# EAGLE board Scematic (EAGLE 7.2.0)
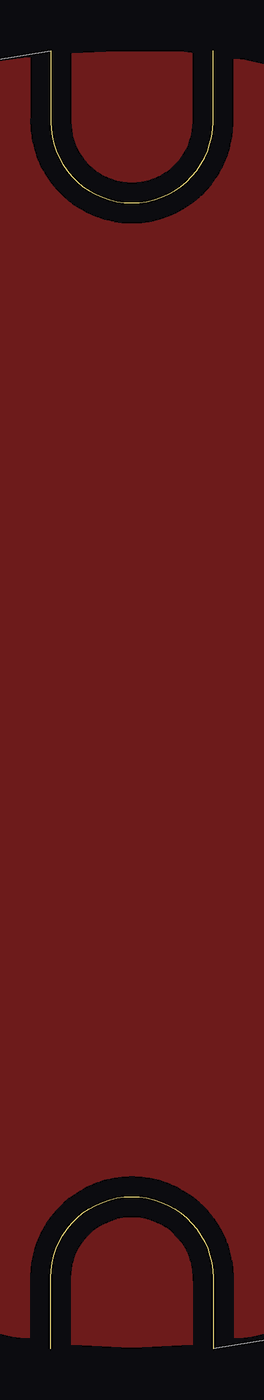
[diagram p0: board, top side]
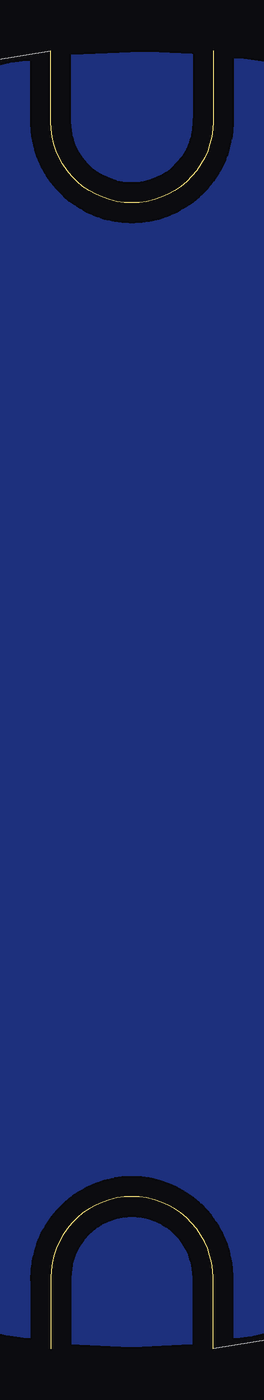
[diagram p1: board, bottom side, seen from below]

Size 8 x 64 mm. Coordinates in mm from the lower left corner, seen from the top.
Copper layers (1*16): Top 0.035mm / dielectric 1.5mm / Bottom 0.035mm
Design rules "default": minimum track width 10mil, minimum drill 24mil, track to track 8mil, track to pad 8mil, pad to pad 8mil, via to via 8mil, smd to smd 8mil, copper to edge 40mil, drill to drill 8mil, minimum pad ring 10mil, minimum via ring 8mil, stop-mask expansion 4mil, vias tented up to drill 0mil, thermal gap 10mil

## Placement (x,y rotation side)
U$1  [UNTERPUTZDOSE]  4,32 0 top

## Library data of the parts
U$1 = dimensions

## Tracks (layer width: path | path; a pad name or v marks a point on that pad's centre or on a via)
N$1
  pour Bottom: 2.73,63.75 arc90 -27.75,33.27 -27.75,32 arc90 4,0.25 arc94 35.75,34.54 arc86 4,63.75
N$2
  pour Top: 5.27,63.75 2.73,63.75 arc90 -27.75,33.27 -27.75,32 arc90 4,0.25 arc90 35.75,32 arc85 6.54,63.75